# Altium PCB PFSMPS20.PcbDoc (part 1 of 3)
Units mm, origin at the board's own origin, x right, y up, seen from the top; angles counter-clockwise.
Board outline 225.58 x 155.55 mm, 3 copper layers (Top Layer, Mid-Layer 3, Bottom Layer); 286 components, 176 nets, 1075 pads, 309 vias.
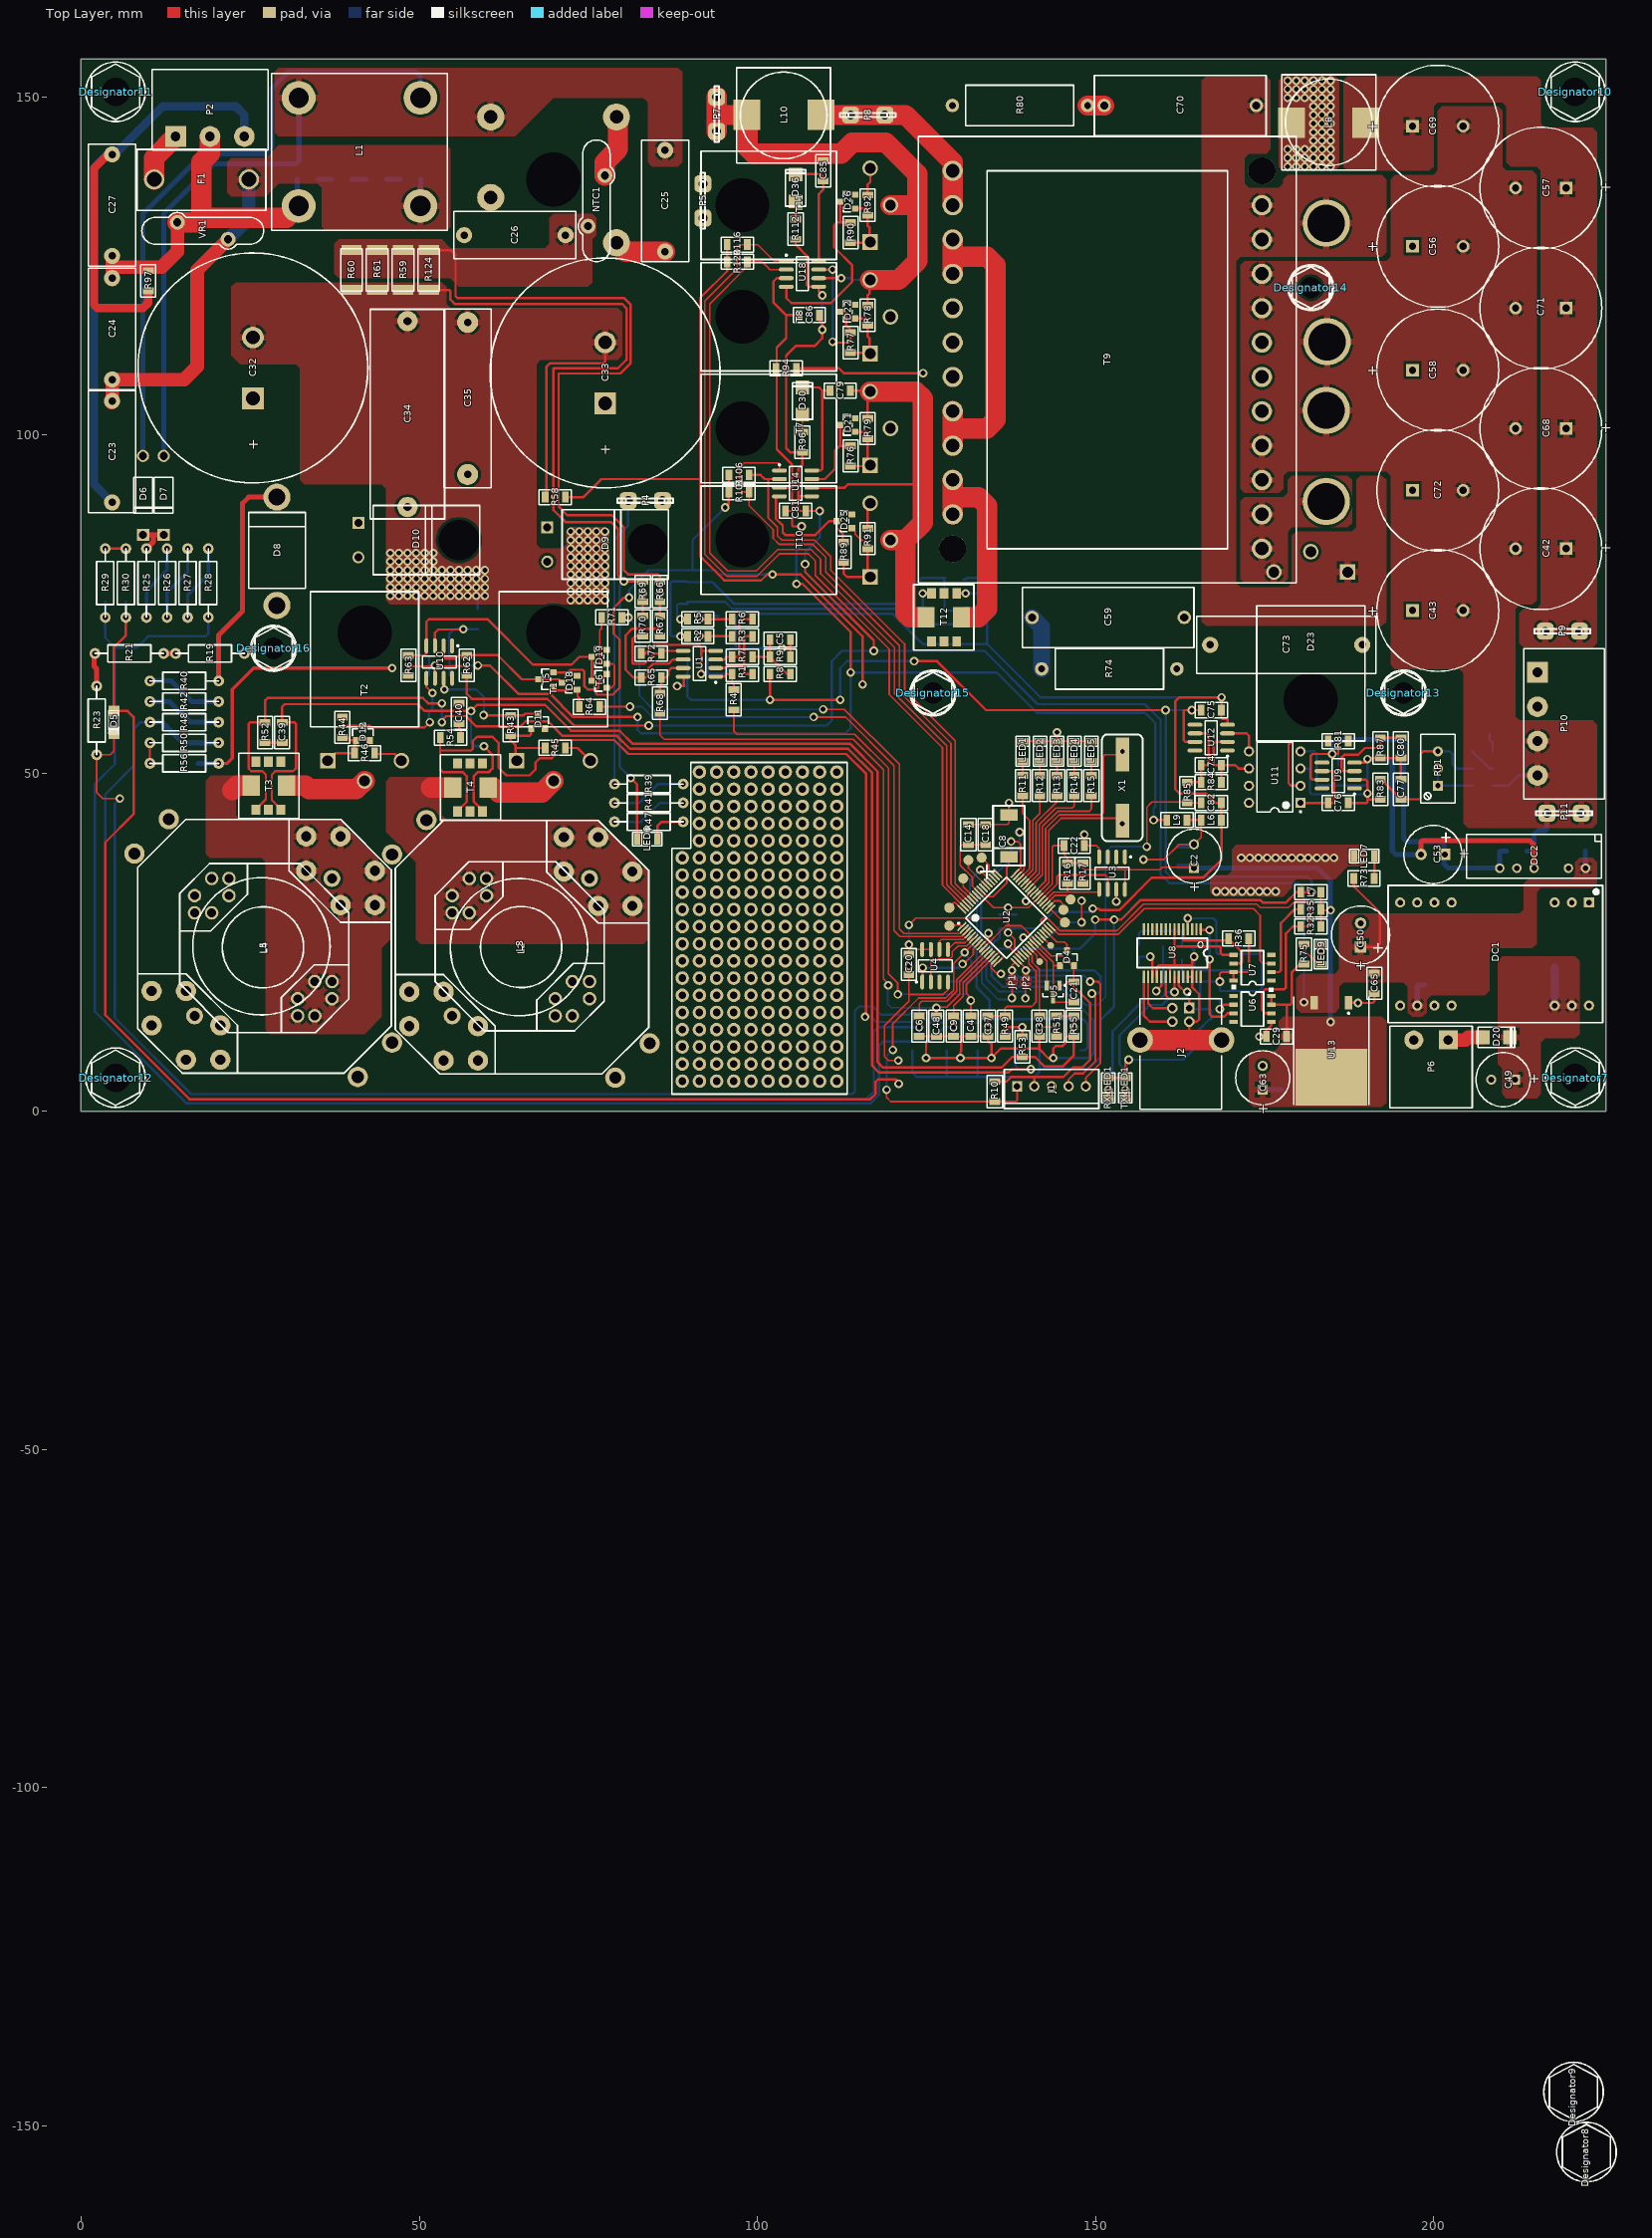
[diagram p0: Top Layer view]
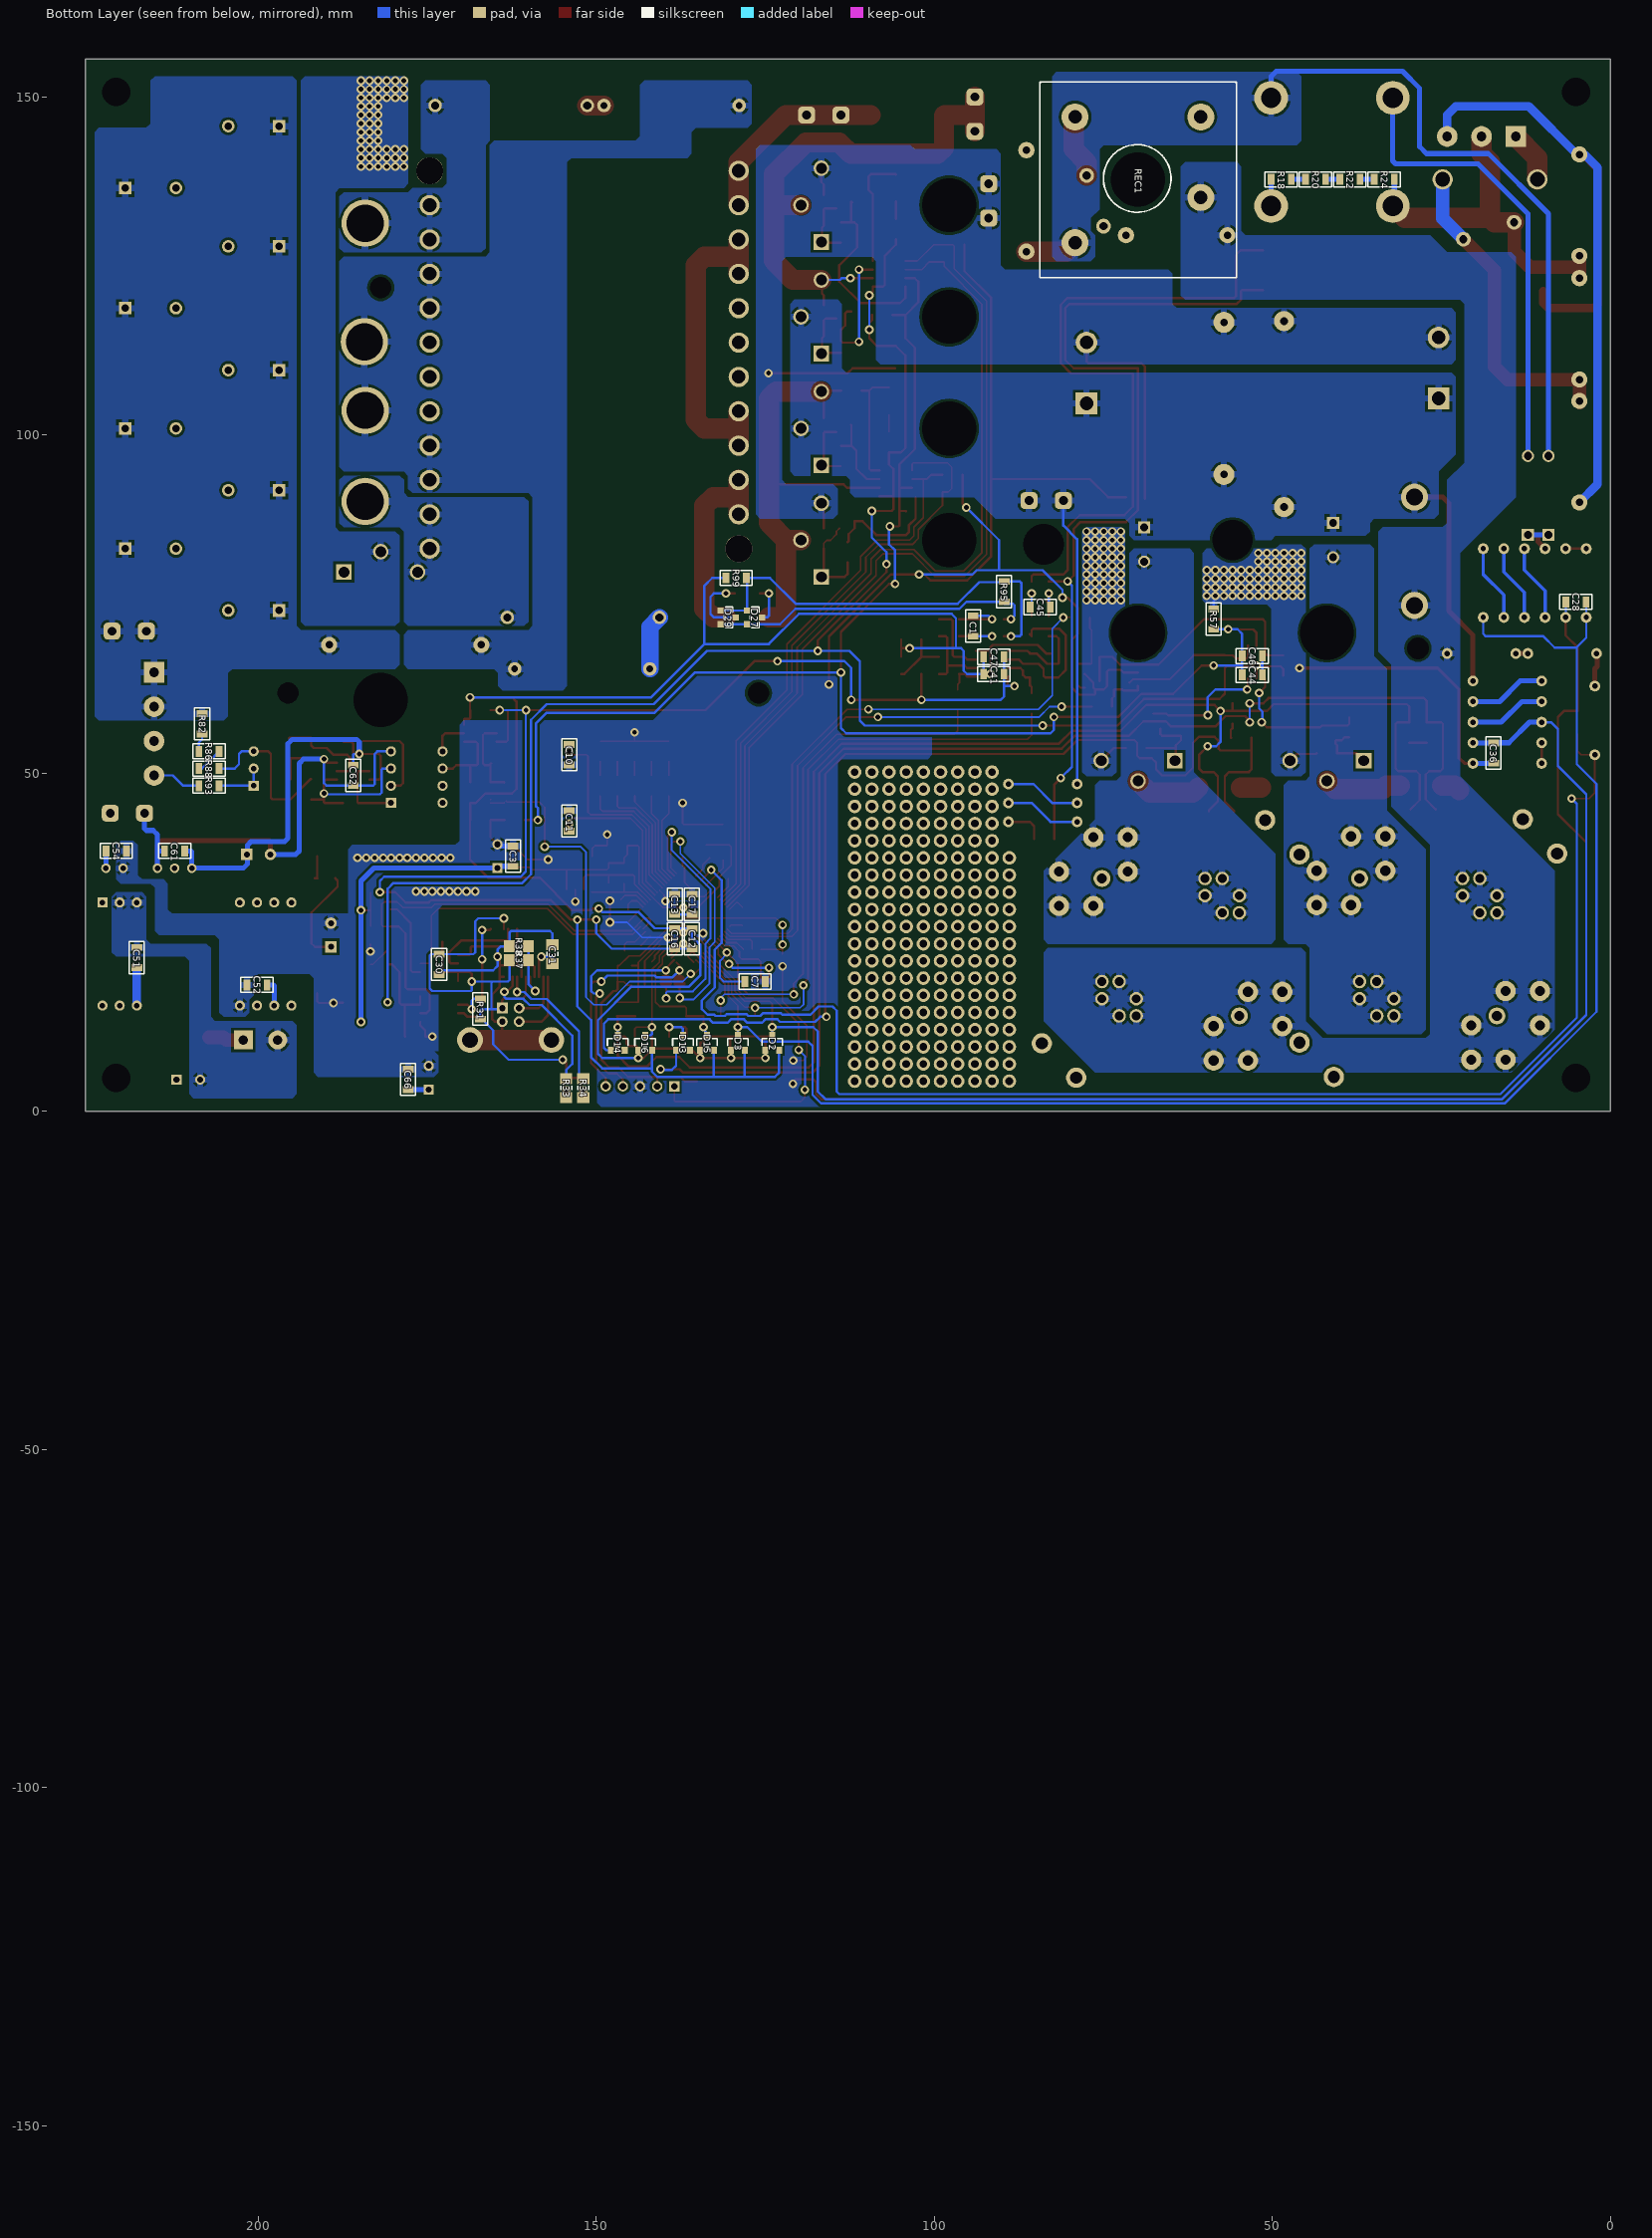
[diagram p1: Bottom Layer view, seen from below]

## Layer stack, top to bottom
Top Layer: signal copper 0.0356
Dielectric: dielectric 0.32, FR-4, Dk 4.8
Mid-Layer 3: signal copper 0.0356
Dielectric: dielectric 0.32, FR-4, Dk 4.8
Bottom Layer: signal copper 0.0356

## Board outline
-0.025,0.025 -0.025,155.575 225.552,155.575 225.552,0.025

## Design rules (kind name [scope] priority, off if disabled: settings)
Clearance Clearance_2 [InNamedPolygon(' ') Or  InNamedPolygon(' ') Or  InNamedPolygon(' ') Or  InNamedPolygon(' ') Or  InNamedPolygon(' ') Or  InNamedPolygon(' ') Or  InNamedPolygon(' ') Or  InNamedPolygon(' ') Or  InNamedPolygon(' ') Or  InNamedPolygon(' ') Or  InNamedPolygon(' ') Or  InNamedPolygon(' ') Or  InNamedPolygon(' ') Or  InNamedPolygon(' ') Or  InNamedPolygon(' ') Or  InNamedPolygon(' ') Or  InNamedPolygon(' ') Or  InNamedPolygon(' ') Or  InNamedPolygon(' ') Or  InNamedPolygon(' ') Or  InNamedPolygon(' ') Or  InNamedPolygon(' ') Or  InNamedPolygon(' ') Or  InNamedPolygon(' ') Or  InNamedPolygon(' ')] p1: gap=0.381
Clearance Clearance_1 [InPolygon] p2: gap=0.381
Clearance [All] p3: gap=0.195
ComponentClearance [All] p1 off: gap=0.254 collisioncheckmode=3 verticalgap=0.254 showdistances=FALSE
ComponentClearance ComponentClearance_1 [All] p2 off: gap=0.254 collisioncheckmode=3 verticalgap=0.254 showdistances=FALSE
DiffPairsRouting DiffPair_DiffPairsRouting [InDifferentialPair ('OSC')] p1: maxlimit=0.254 minlimit=0.254 mostfreqgap=0.254 maxuncoupledlength=12.7
DiffPairsRouting DiffPair_DiffPairsRouting_1 [InDifferentialPair ('OSC')] p2: maxlimit=0.254 minlimit=0.254 mostfreqgap=0.254 maxuncoupledlength=12.7
DiffPairsRouting DiffPair_DiffPairsRouting_2 [InDifferentialPair ('OSC')] p3: maxlimit=0.254 minlimit=0.254 mostfreqgap=0.254 maxuncoupledlength=12.7
DiffPairsRouting DiffPair_DiffPairsRouting_3 [InDifferentialPair ('OSC')] p4: maxlimit=0.254 minlimit=0.254 mostfreqgap=0.254 maxuncoupledlength=12.7
DiffPairsRouting DiffPair_DiffPairsRouting_4 [InDifferentialPair ('OSC')] p5: maxlimit=0.254 minlimit=0.254 mostfreqgap=0.254 maxuncoupledlength=2
DiffPairsRouting DiffPair_DiffPairsRouting_5 [All] p6: maxlimit=0.254 minlimit=0.254 mostfreqgap=0.254 maxuncoupledlength=12.7
DiffPairsRouting DiffPair_DiffPairsRouting_6 [InDifferentialPair ('OSC')] p7: maxlimit=0.254 minlimit=0.254 mostfreqgap=0.254 maxuncoupledlength=12.7
DiffPairsRouting [All] p8: maxlimit=0.254 minlimit=0.254 mostfreqgap=0.254 maxuncoupledlength=12.7
DiffPairsRouting DiffPairsRouting_1 [All] p9: maxlimit=0.254 minlimit=0.254 mostfreqgap=0.254 maxuncoupledlength=12.7
FanoutControl Fanout_LCC [IsLCC] p1: bgadir=Out bgaviamode=Centered fanoutstyle=Auto fanoutdirection=Alternating viagrid=0.025 // Fanout_LCC (Default Rule)
FanoutControl Fanout_BGA [IsBGA] p2: bgadir=Out bgaviamode=Centered fanoutstyle=Auto fanoutdirection=Alternating viagrid=0.025 // Fanout_BGA (Default Rule)
FanoutControl Fanout_Default [All] p4: bgadir=Out bgaviamode=Centered fanoutstyle=Auto fanoutdirection=Alternating viagrid=0.025 // Fanout_Default (Default Rule)
FanoutControl Fanout_Small [(CompPinCount < 5)] p5: bgadir=Out bgaviamode=Centered fanoutstyle=Auto fanoutdirection=OutThenIn viagrid=0.025 // Fanout_Small (Default Rule)
FanoutControl Fanout_BGA_1 [IsBGA] p6: bgadir=Out bgaviamode=Centered fanoutstyle=Auto fanoutdirection=Alternating viagrid=0.025 // Fanout_BGA (Default Rule)
FanoutControl Fanout_LCC_1 [IsLCC] p7: bgadir=Out bgaviamode=Centered fanoutstyle=Auto fanoutdirection=Alternating viagrid=0.025 // Fanout_LCC (Default Rule)
FanoutControl Fanout_SOIC_1 [IsSOIC] p8: bgadir=Out bgaviamode=Centered fanoutstyle=Auto fanoutdirection=Alternating viagrid=0.025 // Fanout_SOIC (Default Rule)
FanoutControl Fanout_Small_1 [(CompPinCount < 5)] p9: bgadir=Out bgaviamode=Centered fanoutstyle=Auto fanoutdirection=OutThenIn viagrid=0.025 // Fanout_Small (Default Rule)
FanoutControl Fanout_Default_1 [All] p10: bgadir=Out bgaviamode=Centered fanoutstyle=Auto fanoutdirection=Alternating viagrid=0.025 // Fanout_Default (Default Rule)
Height Height_1 [All] p2: minheight=0 maxheight=25.4 prefheight=12.7
HoleSize [All] p1: absolutevalues=TRUE maxlimit=8 minlimit=0.025 maxpercent=80.000 minpercent=20.000
LayerPairs LayerPairs_1 [All] p2: enforce=TRUE
MatchedLengths [InNet('OSC_N')] p1: tolerance=0.001 checknetsindiffpair=TRUE checkdiffpairvsdiffpair=TRUE checkothers=TRUE
PasteMaskExpansion PasteMaskExpansion_1 [All] p2: expansion=0
PlaneClearance [(IsPolygon)] p1: clearance=0.635
PlaneClearance PlaneClearance_1 [(IsPolygon)] p2: clearance=0.635
PolygonConnect PolygonConnect_7 [(InComponent('U13')) vs IsNamedPolygon(' ')] p1: connectstyle=Direct reliefconductorwidth=0.254 reliefentries=4 polygonreliefangle="90 Angle"
PolygonConnect PolygonConnect_6 [(InComponent('NTC1')) vs IsNamedPolygon(' ')] p2: connectstyle=Direct reliefconductorwidth=0.254 reliefentries=4 polygonreliefangle="90 Angle"
PolygonConnect PolygonConnect_5 [(InComponent('R60')  Or  InComponent('R61')  Or  InComponent('R59')  Or  InComponent('R124')) vs IsNamedPolygon(' ') Or  IsNamedPolygon(' ')] p3: connectstyle=Direct reliefconductorwidth=0.254 reliefentries=4 polygonreliefangle="90 Angle"
PolygonConnect PolygonConnect_4 [(InComponent('L8')) vs IsNamedPolygon(' ')] p4: connectstyle=Direct reliefconductorwidth=0.254 reliefentries=4 polygonreliefangle="90 Angle"
PolygonConnect PolygonConnect_3 [(InPadClass('All Pads')) vs IsNamedPolygon(' ') Or  IsNamedPolygon(' ') Or  IsNamedPolygon(' ')] p5: connectstyle=Relief reliefconductorwidth=1 reliefentries=4 polygonreliefangle="90 Angle"
PolygonConnect PolygonConnect_2 [All vs IsNamedPolygon(' ') Or  IsNamedPolygon(' ') Or  IsNamedPolygon(' ')] p6: connectstyle=Direct reliefconductorwidth=0.254 reliefentries=4 polygonreliefangle="90 Angle"
PolygonConnect [All] p7: connectstyle=Relief reliefconductorwidth=1 reliefentries=4 polygonreliefangle="90 Angle"
PolygonConnect PolygonConnect_1 [All] p8: connectstyle=Relief reliefconductorwidth=1 reliefentries=4 polygonreliefangle="90 Angle"
RoutingLayers [All] p1: top layer_v5=TRUE mid layer 3_v5=FALSE bottom layer_v5=TRUE
RoutingPriority RoutingPriority_1 [All] p2: routingpriority=0
RoutingTopology RoutingTopology_1 [All] p2: topology=Shortest
RoutingVias [All] p1: holewidth=0.6 width=1 viastyle="Through Hole" minholewidth=0.711 minwidth=1.27 maxholewidth=0.711 maxwidth=1.27
ShortCircuit ShortCircuit_1 [All] p2: allowed=FALSE
SilkscreenOverComponentPads [All] p1: minsilkscreentomaskgap=0.254
SolderMaskExpansion [All] p1: expansion=0.102
SolderMaskExpansion SolderMaskExpansion_1 [All] p2: expansion=0.102
TestPointUsage [All] p1: valid=0 allowmultiple=FALSE
TestPointUsage TestPointUsage_1 [All] p2: valid=0 allowmultiple=FALSE
Testpoint [All] p1: side=15 testpointundercomponent=TRUE minsize=1.016 maxsize=2.54 preferedsize=1.524 minholesize=0 maxholesize=1.016 preferedholesize=0.813 testpointgrid=0.025 style=1023 order=0-112345678
Testpoint Testpoint_1 [All] p2: side=15 testpointundercomponent=TRUE minsize=1.016 maxsize=2.54 preferedsize=1.524 minholesize=0 maxholesize=1.016 preferedholesize=0.813 testpointgrid=0.025 style=1023 order=0-112345678
UnRoutedNet UnRoutedNet_1 [All] p2:
Width [All] p1 off: maxlimit=3 minlimit=0.2 preferedwidth=0.2
14 further rules are at their usual default settings.

## Classes and differential pairs
component class MCU: C1 C4 C5 C6 C7 C8 C9 C10 C11 C12 C13 C14 C16 C17 C18 C20 C21 C22 D2 D3 D4 J1 JP1 JP2 LED1 LED2 LED3 LED4 LED5 OSC? R1 R2 R3 R4 R5 R6 R7 R8 R9 R10 R11 R12 R13 R14 R15 R16 R17 U1 U2 U3 U4 U5 X1
component class PFC: C32 C33 C34 C35 C36 C37 C38 C39 C40 C41 C44 C45 C46 C47 C48 D8 D9 D10 D11 D12 D13 D14 D15 D16 D18 D19 L2 L3 L4 L5 L9 LED6 P4 P5 R39 R40 R41 R42 R43 R44 R45 R46 R47 R48 R49 R50 R51 R52 R53 R54 R55 R56 R57 R58 R59 R60 R61 R62 R63 R64 R65 R66 R67 R68 R69 R70 R71 R72 R124 T1 T2 T3 T4 T5 T6 U10
component class PSU: C2 C3 C49 C50 C51 C52 C53 C54 C61 C63 C65 C66 D20 DC1 DC2 L6 L7 LED7 LED9 P6 R73 R75 U13
component class REC: C23 C24 C25 C26 C27 C28 D5 D6 D7 F1 L1 NTC1 P2 R18 R19 R20 R21 R22 R23 R24 R25 R26 R27 R28 R29 R30 R97 REC1 VR1
component class SMPS: C42 C43 C56 C57 C58 C59 C62 C68 C69 C70 C71 C72 C73 C74 C75 C76 C77 C79 C80 C81 C82 C85 C86 D21 D22 D23 D25 D26 D27 D29 D30 D36 L8 L10 P7 P8 P9 P10 P11 R74 R76 R77 R78 R79 R80 R81 R82 R83 R84 R85 R86 R87 R88 R89 R90 R91 R92 R93 R94 R95 R96 R99 R101 R106 R112 R116 R120 RP1 T7 T8 T9 T10 T11 T12 U9 U11 U12 U14 U18
component class USB: C29 C30 C31 J2 R31 R32 R33 R34 R35 R36 R37 R38 RX_LED1 TX_LED1 U6 U7 U8

## Components (designator, comment, footprint, x,y, rotation, side; value= is the part's Value field where it differs from the comment)
C1 "Cap" 1206_REFLOW 94.234,71.755 r270 bottom
C2 "Cap" CAPPR3.5-8x12 164.592,37.719 r90 top
C3 "Cap 1206" 1206_REFLOW 162.306,37.719 r270 bottom
C4 "Cap" 1206_REFLOW 131.572,12.573 r90 top
C5 "Cap" 1206_REFLOW 103.378,69.723 r180 top
C6 "Cap 1206" 1206_REFLOW 123.952,12.573 r90 top
C7 "Cap 1206" 1206_REFLOW 126.492,19.177 r0 bottom
C8 "Tantal" "CASE D" 137.096,40.866 r90 top
C9 "Cap 1206" 1206_REFLOW 129.032,12.573 r90 top
C10 "Cap" 1206_REFLOW 153.987,52.729 r90 bottom
C11 "Cap" 1206_REFLOW 153.987,42.929 r90 bottom
C12 "Cap 1206" 1206_REFLOW 135.826,25.527 r270 bottom
C13 "Cap 1206" 1206_REFLOW 138.366,30.607 r270 bottom
C14 "Cap 1206" 1206_REFLOW 131.217,40.894 r270 top
C16 "Cap 1206" 1206_REFLOW 138.366,25.527 r270 bottom
C17 "Cap 1206" 1206_REFLOW 135.826,30.607 r270 bottom
C18 "Cap 1206" 1206_REFLOW 133.757,40.894 r270 top
C20 "Cap 1206" 1206_REFLOW 122.428,21.717 r270 top
C21 "Cap 1206" 1206_REFLOW 146.812,17.653 r270 top
C22 "Cap 1206" 1206_REFLOW 146.875,39.267 r0 top
C23 "Cap" "RECT 18.0X7.0 RM15.0" 4.572,97.529 r90 top
C24 "Cap" "RECT 18.0X7.0 RM15.0" 4.572,115.697 r270 top
C25 "Cap" "RECT 18.0X7.0 RM15.0" 86.36,134.62 r270 top
C26 "Cap" "RECT 18.0X7.0 RM15.0" 64.135,129.54 r180 top
C27 "Cap" "RECT 18.0X7.0 RM15.0" 4.572,133.985 r90 top
C28 "Cap 1206" 1206_REFLOW 5.08,75.311 r180 bottom
C29 "Cap 1206" 1206_REFLOW 176.784,11.049 r180 top
C30 "Cap 1206" 1206_REFLOW 173.228,21.717 r270 bottom
C31 "Cap" 3216[1206] 156.464,23.241 r270 bottom
C32 "Cap" "CAPR 52X35" 25.4,105.41 r90 top
C33 "Cap" "CAPR 52X35" 77.479,104.674 r90 top
C34 "Cap" "RECT 31.0X11.0 RM27.5" 48.26,116.84 r270 top
C35 "Cap" "RECT 26.5X7.0 RM22.5" 57.15,105.41 r270 top
C36 "Cap 1206" 1206_REFLOW 17.272,52.959 r90 bottom
C37 "Cap 1206" 1206_REFLOW 134.112,12.573 r270 top
C38 "Cap 1206" 1206_REFLOW 141.732,12.573 r270 top
C39 "Cap 1206" 1206_REFLOW 29.718,56.007 r270 top
C40 "Cap 1206" 1206_REFLOW 55.88,58.825 r270 top
C41 "Cap" 1206_REFLOW 91.186,64.643 r180 bottom
C42 "Cap" CAPPR7.5-18x35.5 215.9,83.185 r180 top
C43 "Cap" CAPPR7.5-18x35.5 200.66,74.041 r0 top
C44 "Cap 1206" 1206_REFLOW 52.959,64.516 r0 bottom
C45 "Cap" 1206_REFLOW 84.328,74.549 r0 bottom
C46 "Cap 1206" 1206_REFLOW 52.959,67.31 r0 bottom
C47 "Cap" 1206_REFLOW 91.186,67.183 r180 bottom
C48 "Cap" 1206_REFLOW 126.492,12.573 r90 top
C49 "Cap" CAPPR3.5-8x12 210.312,4.671 r180 top
C50 "Cap" RA_8.0_RM3.5 189.23,26.063 r90 top
C51 "Cap 1206" 1206_REFLOW 217.932,22.733 r270 bottom
C52 "Cap 1206" 1206_REFLOW 200.152,18.669 r180 bottom
C53 "Cap" RA_8.0_RM3.5 199.926,37.973 r180 top
C54 "Cap 1206" 1206_REFLOW 220.98,38.481 r0 bottom
C56 "Cap" CAPPR7.5-18x35.5 200.66,127.889 r0 top
C57 "Cap" CAPPR7.5-18x35.5 215.9,136.525 r180 top
C58 "Cap" CAPPR7.5-18x35.5 200.66,109.601 r0 top
C59 "Cap" CAP26X19P22_5H 151.892,73.025 r0 top
C61 "Cap 1206" 1206_REFLOW 212.344,38.481 r180 bottom
C62 "Cap 1206" 1206_REFLOW 185.928,49.657 r90 bottom
C63 "Cap" CAPPR3.5-8x12 174.752,4.953 r90 top
C65 "Cap 1206" 1206_REFLOW 191.262,18.923 r90 top
C66 "Cap 1206" 1206_REFLOW 177.8,4.699 r270 bottom
C68 "Cap" CAPPR7.5-18x35.5 215.9,100.965 r180 top
C69 "Cap" CAPPR7.5-18x35.5 200.66,145.669 r0 top
C70 "Cap" CAP26X19P22_5H 162.56,148.717 r0 top
C71 "Cap" CAPPR7.5-18x35.5 215.9,118.745 r180 top
C72 "Cap" CAPPR7.5-18x35.5 200.66,91.821 r0 top
C73 "Cap" "RECT 26.5X8.5 RM22.5" 178.234,68.961 r0 top
C74 "Cap 1206" 1206_REFLOW 167.132,51.181 r0 top
C75 "Cap 1206" 1206_REFLOW 167.132,59.309 r0 top
C76 "Cap 1206" 1206_REFLOW 185.928,45.593 r0 top
C77 "Cap 1206" 1206_REFLOW 195.199,47.625 r270 top
C79 "Cap 1206" 1206_REFLOW 112.268,106.553 r180 top
C80 "Cap 1206" 1206_REFLOW 195.199,53.721 r90 top
C81 "Cap 1206" 1206_REFLOW 105.664,88.773 r180 top
C82 "Cap" 1206_REFLOW 167.132,45.593 r180 top
C85 "Cap 1206" 1206_REFLOW 109.728,139.065 r270 top
C86 "Cap 1206" 1206_REFLOW 107.696,117.729 r180 top
D2 "BAT64-04" SOT23_HIS_PRIMARY 124.968,9.017 r180 bottom
D3 "BAT64-04" SOT23_HIS_PRIMARY 130.048,9.017 r180 bottom
D4 "BAT64-04" SOT23_HIS_PRIMARY 144.78,21.539 r0 top
D5 "BZV55CXXX" D_MINIMELF_BZV55C5V1(Primary) 4.826,57.531 r270 top
D6 "1N4007" AFL-W2/X1.8D 9.144,96.901 r270 top
D7 "1N4007" AFL-W2/X1.8D 12.192,96.901 r270 top
D8 "P 1000S" "P 1000 S" 28.956,74.805 r90 top
D9 "DSEP29-06A" "Diode TO-220AC-HV" 71.222,89.07 r270 top
D10 "DSEP29-06A" "Diode TO-220AC-HV" 43.282,89.705 r270 top
D11 "BAS16" SOT23_HIS_PRIMARY 66.548,56.591 r0 top
D12 "BAS16" SOT23_HIS_PRIMARY 40.64,54.813 r0 top
D13 "BAS16" SOT23_HIS_PRIMARY 138.176,9.017 r180 bottom
D14 "BAS16" SOT23_HIS_PRIMARY 147.828,9.017 r180 bottom
D15 "BAT64-04" SOT23_HIS_PRIMARY 134.62,9.017 r180 bottom
D16 "BAT64-04" SOT23_HIS_PRIMARY 143.764,9.017 r180 bottom
D18 "BAS16" SOT23_HIS_PRIMARY 73.33,62.357 r90 top
D19 "BAS16" SOT23_HIS_PRIMARY 77.724,66.167 r90 top
D20 "1N5819" DO-214_S1A(PRIMARY) 209.296,10.922 r0 top
D21 "BAS16" SOT23_HIS_PRIMARY 114.478,100.457 r90 top
D22 "BAS16" SOT23_HIS_PRIMARY 114.478,117.221 r90 top
D23 "DIODE, ULTRAFAST, 30 A, TO-3P" TO-247HV 187.32,79.733 r180 top
D25 "BAS16" SOT23_HIS_PRIMARY 113.97,86.233 r90 top
D26 "BAS16" SOT23_HIS_PRIMARY 114.478,133.477 r90 top
D27 "BAT64-04" SOT23_HIS_PRIMARY 127.686,74.041 r270 bottom
D29 "BAT64-04" SOT23_HIS_PRIMARY 131.572,74.041 r270 bottom
D30 "US1M" DO-214_S1A(PRIMARY) 106.68,105.029 r90 top
D36 "US1M" DO-214_S1A(PRIMARY) 105.664,136.525 r90 top
DC1 "EC3A21HM" DIP24_TRACO 222.972,30.741 r270 top locked
DC2 "AM1D-D" -AM1D_AM1D-D(Primary) 214.884,35.941 r180 top
Designator7 "Comment" WSHR_SPRWSHR_NUT_4MM 220.98,4.953 r0 top
Designator8 "Comment" WSHR_SPRWSHR_NUT_4MM 222.631,-153.924 r0 top
Designator9 "Comment" WSHR_SPRWSHR_NUT_4MM 220.726,-145.034 r0 top
Designator10 "Comment" WSHR_SPRWSHR_NUT_4MM 220.98,150.749 r0 top
Designator11 "Comment" WSHR_SPRWSHR_NUT_4MM 5.08,150.749 r0 top
Designator12 "Comment" WSHR_SPRWSHR_NUT_4MM 5.08,4.953 r0 top
Designator13 "Comment" WSHR_SPRWSHR_NUT_3MM 195.58,61.849 r0 top
Designator14 "Comment" WSHR_SPRWSHR_NUT_3MM 181.864,121.793 r0 top
Designator15 "Comment" WSHR_SPRWSHR_NUT_3MM 125.984,61.849 r0 top
Designator16 "Comment" WSHR_SPRWSHR_NUT_3MM 28.448,68.453 r0 top
F1 "Fuse Holder PCB P15mm" "Fuse Holder PCB P15mm" 10.795,137.922 r0 top
J1 "SIP5" "SIP5 _2" 138.43,3.683 r0 top
J2 "1-1470156-1" USB2.5-2H4D 162.636,14.251 r270 top
JP1 "SOLDERCONTACT" SOLDERCONTACT#1 137.668,19.177 r90 top
JP2 "SOLDERCONTACT" SOLDERCONTACT#2 139.7,19.177 r270 top
L1 "CMIND" CommonModeChoke 50.165,133.86 r180 top
L2 "RM-14 Choke" RM-14 76.454,40.513 r270 top
L3 "RM-10 Choke" RM-10 54.864,31.877 r0 top
L4 "RM-10 Choke" RM-10 37.084,16.637 r180 top
L5 "RM-14 Choke" RM-14 38.354,40.64 r270 top
L6 "RES" 1206_REFLOW 167.132,43.053 r0 top
L7 "RES" 1206_REFLOW 181.864,32.385 r180 top
L8 "SRP1270-100M" "BOURNS - SRP1270-100M" 178.992,146.177 r0 top
L9 "RES" 1206_REFLOW 162.052,43.053 r0 top
L10 "Resonanse inductor. Do Not Place." "BOURNS - SRP1270-100M" 109.425,147.32 r180 top
LED1 "LED" LED_1206 137.969,50.741 r90 top
LED2 "LED" LED_1206 140.509,50.741 r90 top
LED3 "LED" LED_1206 143.049,50.741 r90 top
LED4 "LED" LED_1206 145.589,50.741 r90 top
LED5 "LED" LED_1206 148.129,50.741 r90 top
LED6 "LED" LED_1206 86.189,38.973 r180 top
LED7 "LED" LED_1206 192.234,36.433 r180 top
LED9 "Green" LED_1206 182.102,20.745 r90 top
NTC1 "Varristor" VARISTOR_14 76.2,134.62 r270 top
P2 "MSTBA 2,5/ 3-G-5,08" MSTBA2.5/3G-5.08 13.97,144.145 r0 top
P4 "FASTON 6.3MM" "FASTON 6.3mm" 83.312,90.297 r0 top
P5 "FASTON 6.3MM" "FASTON 6.3mm" 91.948,134.493 r90 top
P6 "MSTBA 2,5/ 2-G-5,08" "STLZ950 2G-5.08-H" 202.184,10.541 r180 top
P7 "FASTON 6.3MM" "FASTON 6.3mm" 93.98,147.32 r90 top
P8 "FASTON 6.3MM" "FASTON 6.3mm" 116.205,147.32 r0 top
P9 "FASTON 6.3MM" "FASTON 6.3mm" 218.948,70.993 r0 top
P10 "MSTBA 2,5/ 4-G-5,08" MSTBA2.5/4G-5.08 215.392,64.897 r270 top
P11 "FASTON 6.3MM" "FASTON 6.3mm" 219.456,44.069 r180 top
R1 "RES" 1206_REFLOW 97.79,64.643 r180 top
R2 "RES" 1206_REFLOW 91.186,70.231 r0 top
R3 "RES" 1206_REFLOW 97.79,70.231 r0 top
R4 "RES" 1206_REFLOW 96.52,60.833 r90 top
R5 "RES" 1206_REFLOW 91.186,72.771 r0 top
R6 "RES" 1206_REFLOW 97.79,72.771 r0 top
R7 "RES" 1206_REFLOW 97.79,67.183 r180 top
R8 "RES" 1206_REFLOW 103.378,64.643 r0 top
R9 "RES" 1206_REFLOW 103.378,67.183 r180 top
R10 "RES" 1206_REFLOW 135.128,2.921 r270 top
R11 "RES" 1206_REFLOW 139.255,48.157 r90 top
R12 "RES" 1206_REFLOW 141.795,48.157 r90 top
R13 "RES" 1206_REFLOW 144.335,48.157 r90 top
R14 "RES" 1206_REFLOW 146.875,48.157 r90 top
R15 "RES" 1206_REFLOW 149.415,48.157 r90 top
R16 "RES" 1206_REFLOW 145.859,35.203 r270 top
R17 "RES" 1206_REFLOW 148.145,35.203 r270 top
R18 "RES" 1206_REFLOW 48.685,137.795 r180 bottom
R19 "RES" RA161004 24.13,67.691 r180 top locked
R20 "RES" 1206_REFLOW 43.605,137.795 r180 bottom
R21 "RES" RA161004 12.192,67.691 r180 top locked
R22 "RES" 1206_REFLOW 38.525,137.795 r180 bottom
R23 "RES" RA161004 2.286,62.865 r270 top locked
R24 "RES" 1206_REFLOW 33.445,137.795 r180 bottom
R25 "RES" RA161004 9.652,83.185 r270 top locked
R26 "RES" RA161004 12.7,83.185 r270 top locked
R27 "RES" RA161004 15.748,83.185 r270 top locked
R28 "RES" RA161004 18.796,83.185 r270 top
R29 "RES" RA161004 3.556,73.025 r90 top locked
R30 "RES" RA161004 6.604,83.185 r270 top
R31 "RES" 1206_REFLOW 167.132,15.113 r90 bottom
R32 "RES" 1206_REFLOW 181.864,27.305 r180 top
R33 "Resistor" 3216[1206] 154.432,3.429 r270 bottom
R34 "Resistor" 3216[1206] 151.892,3.429 r270 bottom
R35 "RES" 1206_REFLOW 181.864,29.845 r180 top
R36 "RES" 1206_REFLOW 171.196,25.527 r180 top
R37 "Resistor" 3216[1206] 161.417,22.352 r0 bottom
R38 "Resistor" 3216[1206] 161.417,24.384 r180 bottom
R39 "RES" RA161004 78.867,48.387 r0 top
R40 "RES" RA161004 20.32,63.627 r180 top locked
R41 "RES" RA161004 78.867,45.593 r0 top locked
R42 "RES" RA161004 20.32,60.579 r180 top locked
R43 "RES" 1206_REFLOW 63.5,57.023 r270 top
R44 "RES" 1206_REFLOW 38.608,56.769 r90 top
R45 "RES" 1206_REFLOW 70.104,53.721 r180 top
R46 "RES" 1206_REFLOW 41.91,52.959 r0 top
R47 "RES" RA161004 78.867,42.799 r0 top locked
R48 "RES" RA161004 20.32,57.531 r180 top
R49 "RES" 1206_REFLOW 136.652,12.573 r270 top
R50 "RES" RA161004 20.32,54.483 r180 top
R51 "RES" 1206_REFLOW 144.272,12.573 r90 top
R52 "RES" 1206_REFLOW 27.178,56.007 r90 top
R53 "RES" 1206_REFLOW 139.192,9.525 r90 top
R54 "RES" 1206_REFLOW 54.61,55.245 r180 top
R55 "RES" 1206_REFLOW 146.812,12.573 r90 top
R56 "RES" RA161004 10.16,51.435 r0 top locked
R57 "RES" 1206_REFLOW 58.674,72.771 r270 bottom
R58 "RES" 1206_REFLOW 70.104,90.805 r0 top
R59 "RES" 2512_REFLOW 47.593,124.394 r270 top
R60 "RES" 2512_REFLOW 39.973,124.394 r270 top
R61 "RES" 2512_REFLOW 43.783,124.394 r270 top
R62 "RES" 1206_REFLOW 57.023,65.913 r90 top
R63 "RES" 1206_REFLOW 48.387,65.913 r90 top
R64 "RES" 1206_REFLOW 75.184,59.817 r180 top
R65 "RES" 1206_REFLOW 84.328,64.135 r0 top
R66 "RES" 1206_REFLOW 85.598,76.835 r270 top
R67 "RES" 1206_REFLOW 85.598,71.755 r270 top
R68 "RES" 1206_REFLOW 85.598,60.325 r90 top
R69 "RES" 1206_REFLOW 83.058,76.835 r270 top
R70 "RES" 1206_REFLOW 83.058,71.755 r270 top
R71 "RES" 1206_REFLOW 78.486,73.025 r180 top
R72 "RES" 1206_REFLOW 84.328,67.691 r0 top
R73 "RES" 1206_REFLOW 189.738,34.417 r0 top
R74 "2W" "5.5x16mm (2W BODY RES)" 142.052,65.405 r0 top
R75 "RES" 1206_REFLOW 180.848,23.241 r90 top
R76 "RES" 1206_REFLOW 113.792,96.901 r270 top
R77 "RES" 1206_REFLOW 113.792,113.665 r90 top
R78 "RES" 1206_REFLOW 116.332,117.729 r90 top
R79 "RES" 1206_REFLOW 116.332,100.965 r270 top
R80 "2W" "5.5x16mm (2W BODY RES)" 148.844,148.717 r180 top locked
R81 "RES" 1206_REFLOW 185.928,54.737 r180 top
R82 "RES" 1206_REFLOW 208.28,57.277 r270 bottom
R83 "RES" 1206_REFLOW 192.151,47.625 r90 top
R84 "RES" 1206_REFLOW 167.132,48.641 r0 top
R85 "RES" 1206_REFLOW 163.576,47.117 r90 top
R86 "RES" 1206_REFLOW 207.264,53.213 r180 bottom
R87 "RES" 1206_REFLOW 192.151,53.721 r270 top
R88 "RES" 1206_REFLOW 207.264,50.673 r180 bottom
R89 "RES" 1206_REFLOW 112.776,82.677 r90 top
R90 "RES" 1206_REFLOW 113.792,129.921 r270 top
R91 "RES" 1206_REFLOW 116.332,84.685 r90 top
R92 "RES" 1206_REFLOW 116.332,133.985 r270 top
R93 "RES" 1206_REFLOW 207.264,48.133 r0 bottom
R94 "RES" 1206_REFLOW 104.267,109.855 r180 top
R95 "RES" 1206_REFLOW 89.662,76.835 r90 bottom
R96 "RES" 1206_REFLOW 106.68,98.933 r90 top
R97 "RES" 1206_REFLOW 9.906,122.809 r90 top
R99 "RES" 1206_REFLOW 129.286,78.867 r0 bottom
R101 "RES" 1206_REFLOW 97.282,91.567 r0 top
R106 "RES" 1206_REFLOW 97.282,94.107 r0 top
R112 "RES" 1206_REFLOW 105.664,130.429 r90 top
R116 "RES" 1206_REFLOW 97.028,128.143 r0 top
R120 "RES" 1206_REFLOW 97.028,125.603 r0 top
R124 "RES" 2512_REFLOW 51.403,124.394 r270 top
REC1 "KBPC2504W" KBPC2504W 60.468,128.427 r0 bottom
RP1 "Trimmer" BOURNS3296W 199.136,46.609 r90 top locked
RX_LED1 "GREEN LED" LED_1206 153.178,5.925 r270 top
T1 "MOSFET, N, 500V, TO-247" TO-247HV 64.394,51.839 r0 top
T2 "MOSFET, N, 500V, TO-247" TO-247HV 36.454,51.839 r0 top
T3 "PA1005.XXXNL" "PA1005.XXXNL Series" 25.845,51.688 r0 top
T4 "PA1005.XXXNL" "PA1005.XXXNL Series" 55.667,51.434 r0 top
T5 "BC847A" SOT23_HIS_PRIMARY 69.85,62.865 r90 top
T6 "BC847A" SOT23_HIS_PRIMARY 77.724,62.611 r90 top
T7 "MOSFET, N, 500V, TO-247" TO-247HV 116.69,95.509 r90 top
T8 "MOSFET, N, 500V, TO-247" TO-247HV 116.69,112.019 r90 top
T9 "ETD55_Transformer" ETD54_Transformer 174.625,139.065 r270 top
T10 "MOSFET, N, 500V, TO-247" TO-247HV 116.69,78.999 r90 top
T11 "MOSFET, N, 500V, TO-247" TO-247HV 116.69,128.529 r90 top
T12 "PA1005.XXXNL" "PA1005.XXXNL Series" 129.476,69.47 r180 top
TX_LED1 "RED LED" LED_1206 155.718,5.925 r270 top
U1 "MCP6022-I/SN (OPA2336)" SOIC-SN8_N 91.44,66.167 r180 top
U2 "dsPIC33FJ64GS606" TQFP-PT64_N 136.842,28.575 r45 top
U3 "24LC04B-I/SN" SOIC-SN8_N 152.463,35.203 r270 top
U4 "23K256-I/SN" SOIC-SN8_N 126.301,21.511 r90 top
U5 "MCP9700T-E/TT" SOT-23-TT3_N 143.764,17.653 r270 top
U6 "HCPL0601" SO8_HIS 173.228,15.113 r0 top
U7 "HCPL0601" SO8_HIS 173.228,21.209 r180 top
U8 "FT232RL" SSOP28 165.562,24.634 r270 top
U9 "MCP601T-I/SN" SOIC-SN8_N 185.928,49.657 r180 top
U10 "MCP1403T-E/SN" SOIC-SN8_N 52.959,66.421 r270 top
U11 "Analog optocoupler" "DIP8 6n138" 180.33,44.303 r180 top locked
U12 "MCP601T-I/SN" SOIC-SN8_N 167.132,55.245 r180 top
U13 "LD1086D2T33TR" D2PAK 184.912,10.541 r180 top
U14 "IRS2186SPBF" SO-8_N 105.664,92.837 r0 top
U18 "IRS2186SPBF" SO-8_N 106.68,123.825 r0 top
VR1 "Varristor" VARISTOR_14 17.974,130.195 r180 top
X1 "XTAL" XTAL 153.987,43.056 r90 top

## Footprints (in the part's own frame and the unit in brackets; to place one, negate y for a bottom-side part, rotate by r counter-clockwise, add the part's x,y. Pads: shape width x height; smd on the part's side, far side on the other; paste and mask are expansions set on the pad)
"5.5x16mm (2W BODY RES)" [mm]
  round 2 hole 1: 1(0,0) 2(20,0)
  silkscreen extent 2.03,-3 18.03,3
1206_REFLOW [mm]
  rect 1x1.6 smd: 1(-1.5,0) 2(1.5,0)
  silkscreen extent -2.38,-1.11 2.38,1.11
2512_REFLOW [mm]
  rect 1.5x3 smd paste-25.4: 1(-2.95,0) 2(2.95,0)
  silkscreen extent -3.15,-1.6 3.15,1.6
3216[1206] [mm] "Chip Resistor; Body 3.2 x 1.6 mm (LxW typ)"
  rect 1.6x1.8 smd: 1(-1.4,0) 2(1.4,0)
  silkscreen extent -0.3,-0.8 0.3,0.8
-AM1D_AM1D-D(Primary) [mm]
  round 1.4 hole 0.8: 1(-7.62,0) 2(-5.08,0) 4(0,0) 5(2.54,0) 6(5.08,0)
  silkscreen extent -10,-5 10,1.5
AFL-W2/X1.8D [mm]
  round 1.8 hole 1.2: 1(0,0)
  rect 1.8x1.8 hole 1.2: 2(11.65,0)
  silkscreen extent 3.17,-1.4 8.47,1.4
BOURNS3296W [mm] "BOURNS3296W Trimmer"
  rect 1.5x1.5 hole 0.8: 1(1.524,-1.524)
  round 1.5 hole 0.8: 2(4.064,-1.524) 3(6.604,-1.524)
  silkscreen extent -1.02,-4.06 9.14,1.02
"BOURNS - SRP1270-100M" [mm]
  rect 4x4.5 smd: 1(0,0) 2(11,0)
  silkscreen extent -1.4,-7 12.5,7.1
CAP26X19P22_5H [mm]
  round 2 hole 1.2: 1(-11.25,0) 2(11.25,0)
  silkscreen extent -12.7,-4.44 12.7,4.44
CAPPR3.5-8x12 [mm] "Capacitor, Electrolytic, Radial; Body 8 x 12 mm (Dia.xH typ); Pin Spacing 3.5 mm (typ)"
  rect 1.5x1.5 hole 0.9: 1(-1.75,0)
  round 1.5 hole 0.9: 2(1.75,0)
  silkscreen extent -4,-4 4,4
CAPPR7.5-18x35.5 [mm] "Capacitor, Electrolytic, Radial; Body 18 x 35.5 mm (Dia.xH typ); Pin Spacing 7.5 mm (typ)"
  rect 1.85x1.85 hole 1.1: 1(-3.75,0)
  round 1.85 hole 1.1: 2(3.75,0)
  silkscreen extent -9,-9 9,9
"CAPR 52X35" [mm]
  rect 3.2x3.2 hole 2: 1(0,0)
  round 3.2 hole 2: 2(9,0)
  silkscreen extent -12.5,-17 21.5,17
"CASE D" [mm] "Capacitor Case D"
  rect 1.7x2.6 smd paste-25.4: 1(-3.227,-0.127) 2(2.973,-0.127)
  silkscreen extent -6.43,-2.47 4.27,4.13
CommonModeChoke [mm]
  round 5 hole 3: 1(0,0) 2(0,-16) 3(18,0) 4(18,-16)
  silkscreen extent -4,-19.6 22,3.6
D2PAK [mm] "D2-PAK/TO-263-AB; 3 Leads (1 Cropped); Body 15.5 (inc. leads) x 10.5 mm (LxW max)"
  rect 1.05x2 smd: 1(-2.54,-5.5) 3(2.54,-5.5)
  rect 10.55x8.4 smd: 2(0,5.5)
  silkscreen extent -5.57,-6.4 5.57,9.6
D_MINIMELF_BZV55C5V1(Primary) [mm]
  rect 1.6x1.6 smd: A(-1.67,0) K(1.7,0)
  silkscreen extent -1.72,-0.76 1.73,0.76
"Diode TO-220AC-HV" [mil]
  rect 70x70 hole 46: 1(106.69,-90)
  round 70 hole 46: 2(306.69,-90)
  round 0 hole 236.22: ""(206.69,496)
  silkscreen extent 5,-4 409,616
"DIP8 6n138" [mm]
  rect 1.5x1.5 hole 0.9: 1(-0.01,-1.29)
  round 1.5 hole 0.9: 2(-0.01,-3.83) 3(-0.01,-6.37) 4(-0.01,-8.91) 5(7.61,-8.91) 6(7.61,-6.37) 7(7.61,-3.83) 8(7.61,-1.29)
  silkscreen extent -0.14,-10.25 6.45,0.13, body extent 0.2,-10.25 7.4,0.05, height 5.33
DIP24_TRACO [mm]
  rect 1.5x1.5 hole 0.8: 1(-0.12,0.04)
  round 1.5 hole 0.8: 2(-0.12,-2.5) 3(-0.12,-5.04) 5(-0.12,-22.82) 7(-0.12,-27.9) 8(15.12,-27.9) 9(-0.12,-20.28) 10(15.12,-22.82) 11(-0.12,-25.36) 14(15.12,-25.36) 16(15.12,-20.28) 22(15.12,-5.04) 23(15.12,-2.5) 24(15.12,0.04)
  silkscreen extent -2.66,-29.68 17.66,2.07
DO-214_S1A(PRIMARY) [mm]
  rect 2x2 smd: A(-2,0) K(2,0)
  silkscreen extent -2.7,-1.5 2.75,1.5
ETD54_Transformer [mm]
  round 3 hole 2: 1(0,-45.72) 2(5.08,-45.72) 3(10.16,-45.72) 4(15.24,-45.72) 5(20.32,-45.72) 6(25.4,-45.72) 7(30.48,-45.72) 8(35.56,-45.72) 9(40.64,-45.72) 10(45.72,-45.72) 11(50.8,-45.72) 12(55.88,0) 13(50.8,0) 14(45.72,0) 15(40.64,0) 16(35.56,0) 17(30.48,0) 18(25.4,0) 19(20.32,0) 20(15.24,0) 21(10.16,0) 22(5.08,0)
  round 4 hole 4 unplated: ""(0,0) ""(55.88,-45.72)
  silkscreen extent -5.08,-50.8 60.96,5.08
"FASTON 6.3mm" [mm]
  rrect50% 2.5x2.5 hole 1.3: 1(-2.413,0) 2(2.667,0)
  silkscreen extent -4,-0.32 4.25,0.32
"Fuse Holder PCB P15mm" [mm]
  round 3 hole 2.2: 1(0,-0.127) 2(14,-0.127)
  silkscreen extent -2.54,-4.72 16.51,4.3
KBPC2504W [mm]
  round 4 hole 2: 1(0.1,-6.7) 2(18.7,0) 3(18.7,-18.6) 4(0.1,-18.6)
  round 0 hole 8: M6(9.382,-9.368)
  silkscreen extent -5.2,-23.8 23.9,5.15
LED_1206 [mm]
  rect 1x1.6 smd paste-25.4: A(0.972,-1.286) K(3.972,-1.286)
  silkscreen extent 0.27,-2.29 4.67,-0.29
MSTBA2.5/3G-5.08 [mil]
  rect 120x120 hole 56: 1(0,0)
  round 120 hole 56: 2(200,0) 3(400,0)
  silkscreen extent -138,-80 538,390
MSTBA2.5/4G-5.08 [mil]
  rect 120x120 hole 56: 1(0,0)
  round 120 hole 56: 2(200,0) 3(400,0) 4(600,0)
  silkscreen extent -138,-80 738,390
"P 1000 S" [mm] "1200V Rectifier Diode"
  round 4 hole 2.5: A(0,0) K(16,0)
  silkscreen extent 2.5,-4.19 13.75,4.19
"PA1005.XXXNL Series" [mm]
  rect 1.3x1.524 smd: 1(0,-7.11) 2(1.85,-7.11) 3(3.7,-7.11) 4(3.7,0) 5(1.85,0) 6(0,0)
  rect 2.54x3.05 smd: 7(4.532,-3.555) 8(-0.699,-3.555)
  silkscreen extent -2.54,-8.4 6.35,1.27
RA161004 [mm]
  round 1.6 hole 0.8: 1(0,0) 2(10.16,0)
  silkscreen extent 0,-1.27 10.16,1.27
RA_8.0_RM3.5 [mm]
  rect 1.7x1.7 hole 0.9: 1(-1.75,0)
  round 1.7 hole 0.9: 2(1.75,0)
  silkscreen extent -4.3,-4.3 4.3,4.3
"RECT 18.0X7.0 RM15.0" [mm]
  round 2.4 hole 1.1: 1(-7.5,0) 2(7.5,0)
  silkscreen extent -9,-3.5 9,3.5
"RECT 26.5X7.0 RM22.5" [mm]
  round 3.1 hole 1.1: 1(-11.25,0) 2(11.25,0)
  silkscreen extent -13.25,-3.5 13.25,3.5
"RECT 26.5X8.5 RM22.5" [mm]
  round 2.4 hole 1.1: 1(-11.25,0) 2(11.25,0)
  silkscreen extent -13.25,-4.25 13.25,4.25
"RECT 31.0X11.0 RM27.5" [mm]
  round 3 hole 1.2: 1(0,0) 2(27.5,0)
  silkscreen extent -1.75,-5.5 29.25,5.5
RM-10 [mm] "RM-10 Ferrite choke"
  round 2 hole 1.3: 1(0,0) 2(2.54,2.54) 3(5.08,2.54) 4(5.08,0) 5(2.54,-2.54) 6(0,-2.54) 7(15.24,-15.24) 8(17.78,-12.7) 9(20.32,-12.7) 10(20.32,-15.24) 11(17.78,-17.78) 12(15.24,-17.78)
  round 2.5 hole 1.5: ""(0,-17.78) ""(20.32,2.54)
  silkscreen extent -2.5,-20 22.5,5
RM-14 [mm] "RM-14 Choke"
  round 3 hole 1.5: 1(0,0) 2(5.08,5.08) 3(10.16,5.08) 4(10.16,0) 5(5.08,-5.08) 6(0,-5.08) 7(22.86,-22.86) 8(27.94,-17.78) 9(33.02,-17.78) 10(33.02,-22.86) 11(27.94,-27.94) 12(22.86,-27.94)
  round 3 hole 1.8: ""(-2.54,-25.4) ""(2.54,-30.48) ""(30.48,7.62) ""(35.56,2.54)
  silkscreen extent -2.5,-30 35,7.5
"SIP5 _2" [mil]
  rect 60x60 hole 38.19: 1(0,0)
  round 60 hole 38.19: 2(100,0) 3(200,0) 4(300,0) 5(400,0)
  silkscreen extent -76,-130 476,98
SO8_HIS [mm]
  rect 1.2x0.6 smd: 1(-2.8,1.905) 2(-2.8,0.635) 3(-2.8,-0.635) 4(-2.8,-1.905) 5(2.8,-1.905) 6(2.8,-0.635) 7(2.8,0.635) 8(2.8,1.905)
  silkscreen extent -3.08,-2.54 1.65,3.56
SO-8_N [mm] "SOIC, 8-Leads, Body 4.9x3.9mm, Pitch 1.27mm, IPC Medium Density"
  oval 2.2x0.6 smd: 1(-2.4,1.905) 2(-2.4,0.635) 3(-2.4,-0.635) 4(-2.4,-1.905) 5(2.4,-1.905) 6(2.4,-0.635) 7(2.4,0.635) 8(2.4,1.905)
  silkscreen extent -2.52,-2.5 0.9,2.88, body extent -1.95,-2.45 1.95,2.45, height 1.75
SOIC-SN8_N [mm] "SOIC, 8-Leads, Body 4.9x3.8mm, Pitch 1.27mm, IPC Medium Density"
  oval 2.2x0.6 smd: 1(-2.4,1.905) 2(-2.4,0.635) 3(-2.4,-0.635) 4(-2.4,-1.905) 5(2.4,-1.905) 6(2.4,-0.635) 7(2.4,0.635) 8(2.4,1.905)
  silkscreen extent -2.53,-2.5 0.9,2.88, body extent -2,-2.5 2,2.5, height 1.75
SOLDERCONTACT#1 [mm]
  rect 0.25x0.25 smd: 1(-0.663,-0.003) 2(0.658,-0.003)
  Top Layer lines w0.1: 0.183,0.795 cw(c0.183,-0.005) 0.254,0.792 ; -0.188,0.792 -0.188,-0.795 ; 0.183,0.79 0.183,-0.798 ; 0.183,-0.805 ccw(c0.183,-0.005) 0.254,-0.802 ; 0.254,0.792 cw(c0.183,-0.005) 0.983,-0.003 ; 0.254,0.792 cw(c0.183,-0.005) 0.983,-0.003 ; -0.988,-0.003 cw(c-0.188,0) -0.696,0.618 cw(c-0.188,0) -0.188,0.8 ccw(c-0.188,0) -0.988,-0.003 ; -0.988,-0.003 ccw(c-0.188,0) -0.188,-0.8 cw(c-0.188,0) -0.988,-0.003 ; 0.983,-0.003 cw(c0.183,-0.005) 0.834,-0.47 cw(c0.183,-0.005) 0.254,-0.802 ; 0.983,-0.003 cw(c0.183,-0.005) 0.254,-0.802
  Top Layer lines w0.3: -0.327,0.376 ccw(c-0.191,0) -0.327,-0.376 ; 0.322,0.371 cw(c0.185,-0.005) 0.322,-0.381 ; -0.345,0.157 -0.345,-0.16 ; 0.34,0.155 0.34,-0.163 ; -0.823,-0.003 cw(c-0.188,0) -0.298,0.625 ccw(c-0.188,0) -0.8,0.168 ccw(c-0.188,0) -0.823,-0.003 ; -0.823,-0.003 ccw(c-0.188,0) -0.298,-0.625 cw(c-0.188,0) -0.823,-0.003 ; 0.818,-0.003 ccw(c0.183,-0.005) 0.293,0.62 cw(c0.183,-0.005) 0.818,-0.003 ; 0.818,-0.003 cw(c0.183,-0.005) 0.795,-0.173 cw(c0.183,-0.005) 0.293,-0.63 ccw(c0.183,-0.005) 0.818,-0.003
SOLDERCONTACT#2 [mm]
  rect 0.25x0.25 smd: 1(-0.663,-0.003) 2(0.658,-0.003)
  Top Layer lines w0.1: -0.188,-0.8 cw(c-0.188,0) -0.345,-0.784 ; 0.183,-0.798 0.183,0.155 0.183,0.79 ; -0.188,-0.795 -0.188,-0.376 -0.188,0 -0.188,0.792 ; 0.183,0.795 cw(c0.183,-0.005) 0.983,-0.003 ; -0.188,0.8 ccw(c-0.188,0) -0.327,0.788 ; -0.345,-0.784 cw(c-0.188,0) -0.988,-0.003 ; -0.345,-0.784 cw(c-0.188,0) -0.988,-0.003 ; 0.982,-0.051 cw(c0.183,-0.005) 0.183,-0.805 ccw(c0.183,-0.005) 0.656,-0.65 ccw(c0.183,-0.005) 0.982,-0.051 ; 0.982,-0.051 ccw(c0.183,-0.005) 0.983,-0.003 ; 0.982,-0.051 ccw(c0.183,-0.005) 0.983,-0.003 ; -0.988,-0.003 cw(c-0.188,0) -0.815,0.496 cw(c-0.188,0) -0.327,0.788 ; -0.988,-0.003 cw(c-0.188,0) -0.327,0.788
  Top Layer lines w0.3: -0.298,-0.625 cw(c-0.188,0) -0.345,-0.615 ; -0.327,-0.376 cw(c-0.191,0) -0.345,-0.369 cw(c-0.191,0) -0.327,0.376 ; 0.34,-0.163 0.34,0.155 ; -0.345,-0.16 -0.345,0 -0.345,0.157 ; 0.293,0.62 cw(c0.183,-0.005) 0.818,-0.003 ; -0.298,0.625 ccw(c-0.188,0) -0.327,0.62 ; -0.345,-0.615 cw(c-0.188,0) -0.823,-0.003 ; -0.345,-0.615 cw(c-0.188,0) -0.823,-0.003 ; 0.816,-0.051 cw(c0.183,-0.005) 0.293,-0.63 ccw(c0.183,-0.005) 0.78,-0.22 ccw(c0.183,-0.005) 0.816,-0.051 ; 0.816,-0.051 ccw(c0.183,-0.005) 0.818,-0.003 ; 0.816,-0.051 ccw(c0.183,-0.005) 0.818,-0.003 ; 0.583,-0.051 cw(c0.185,-0.005) 0.322,-0.381 ccw(c0.185,-0.005) 0.559,-0.148 ccw(c0.185,-0.005) 0.583,-0.051 ; 0.583,-0.051 ccw(c0.185,-0.005) 0.322,0.371 cw(c0.185,-0.005) 0.583,-0.051 ; -0.823,-0.003 cw(c-0.188,0) -0.327,0.62 ; -0.823,-0.003 cw(c-0.188,0) -0.798,0.176 cw(c-0.188,0) -0.327,0.62
SOT23_HIS_PRIMARY [mm]
  rect 0.9x1 smd: 1(0,0) 2(2.032,0) 3(1.016,2.21)
  silkscreen extent -0.51,0.46 2.54,1.73
SOT-23-TT3_N [mm] "SOT23, 3-Leads, Body 2.9x1.3mm, Pitch 0.95mm, Lead Span 2.4mm, IPC Medium Density"
  rect 1.5x0.6 smd: 1(-0.95,0.95) 2(-0.95,-0.95) 3(0.95,0)
  silkscreen extent -1.07,-1.5 0.7,1.93, body extent -0.7,-1.5 0.7,1.5, height 1.12
SSOP28 [mm]
  oval 1.8x0.35 smd: 1(-2.29,0.039)
  rect 1.8x0.35 smd: 2(-2.29,-0.611) 3(-2.29,-1.261) 4(-2.29,-1.911) 5(-2.29,-2.561) 6(-2.29,-3.211) 7(-2.29,-3.861) 8(-2.29,-4.511) 9(-2.29,-5.161) 10(-2.29,-5.811) 11(-2.29,-6.461) 12(-2.29,-7.111) 13(-2.29,-7.761) 14(-2.29,-8.411) 15(4.76,-8.411) 16(4.76,-7.761) 17(4.76,-7.111) 18(4.76,-6.461) 19(4.76,-5.811) 20(4.76,-5.161) 21(4.76,-4.511) 22(4.76,-3.861) 23(4.76,-3.211) 24(4.76,-2.561) 25(4.76,-1.911) 26(4.76,-1.261) 27(4.76,-0.611) 28(4.76,0.039)
  silkscreen extent -0.94,-9.36 3.41,0.99
"STLZ950 2G-5.08-H" [mm]
  rect 2.8x2.8 hole 1.4: 1(0,0)
  round 2.8 hole 1.4: 2(5.08,0)
  silkscreen extent -3.56,-2.03 8.64,10.03
TO-247HV [mm]
  rect 2.3x2.3 hole 1.6: 1(0.011,0)
  round 2.3 hole 1.6: 2(5.461,-3) 3(10.911,0)
  round 0 hole 8 unplated: M3(5.456,18.9)
  silkscreen extent -2.57,5 13.46,25
TQFP-PT64_N [mm] "Thin QFP, 64-Leads, Body 10x10mm, Pitch 0.5mm, IPC Medium Density"
  oval 1.8x0.3 smd: 1(-5.55,3.75) 2(-5.55,3.25) 3(-5.55,2.75) 4(-5.55,2.25) 5(-5.55,1.75) 6(-5.55,1.25) 7(-5.55,0.75) 8(-5.55,0.25) 9(-5.55,-0.25) 10(-5.55,-0.75) 11(-5.55,-1.25) 12(-5.55,-1.75) 13(-5.55,-2.25) 14(-5.55,-2.75) 15(-5.55,-3.25) 16(-5.55,-3.75) 33(5.55,-3.75) 34(5.55,-3.25) 35(5.55,-2.75) 36(5.55,-2.25) 37(5.55,-1.75) 38(5.55,-1.25) 39(5.55,-0.75) 40(5.55,-0.25) 41(5.55,0.25) 42(5.55,0.75) 43(5.55,1.25) 44(5.55,1.75) 45(5.55,2.25) 46(5.55,2.75) 47(5.55,3.25) 48(5.55,3.75)
  oval 0.3x1.8 smd: 17(-3.75,-5.55) 18(-3.25,-5.55) 19(-2.75,-5.55) 20(-2.25,-5.55) 21(-1.75,-5.55) 22(-1.25,-5.55) 23(-0.75,-5.55) 24(-0.25,-5.55) 25(0.25,-5.55) 26(0.75,-5.55) 27(1.25,-5.55) 28(1.75,-5.55) 29(2.25,-5.55) 30(2.75,-5.55) 31(3.25,-5.55) 32(3.75,-5.55) 49(3.75,5.55) 50(3.25,5.55) 51(2.75,5.55) 52(2.25,5.55) 53(1.75,5.55) 54(1.25,5.55) 55(0.75,5.55) 56(0.25,5.55) 57(-0.25,5.55) 58(-0.75,5.55) 59(-1.25,5.55) 60(-1.75,5.55) 61(-2.25,5.55) 62(-2.75,5.55) 63(-3.25,5.55) 64(-3.75,5.55)
  silkscreen extent -5.67,-4.25 4.25,4.57
USB2.5-2H4D [mm] "Connector; USB1.1, Type B, Thru-Hole; 4 Position; Right Angle"
  rect 1.6x1.6 hole 0.92: 1(-1,1.25)
  round 1.6 hole 0.92: 2(-1,-1.25) 3(1,-1.25) 4(1,1.25)
  round 3.8 hole 2.3: 5(3.71,6.02) 6(3.71,-6.02)
  silkscreen extent -3.18,-6.02 13.99,6.02, body extent -2.41,-6.02 13.99,6.02, height 11.1
VARISTOR_14 [mm]
  round 2.2 hole 1.2: 1(-3.75,1.25) 2(3.75,-1.25)
  silkscreen extent -9,-2.7 9,2.7
WSHR_SPRWSHR_NUT_3MM [mm]
  round 0 / inner round 3 / far side round 0 hole 3.2 unplated: 1(0,0)
  silkscreen extent -3.4,-3.4 3.4,3.4
WSHR_SPRWSHR_NUT_4MM [mm]
  round 0 hole 4.2 unplated: 1(0,0)
  silkscreen extent -4.4,-4.4 4.4,4.4
XTAL [mm] "XTAL SMD"
  rect 5x2 smd: 1(-0.127,0) 2(9.673,0)
  silkscreen extent -3.13,-3 12.67,3

## Part data
C2 C32 C33 C42 C43 C49 C50 C53 C56 C57 C58 C63 C68 C69 C71 C72: library part "Cap pol"
C8: library part "CAP CASE D"
D2 D3 D4 D15 D16 D27 D29: "Silicon Schottky Diodes"
D5: "Zener Diode"
D6 D7: "1.0 Ampere General Purpose Rectifier"
D8: "SEMIKRON - P1000S - DIODE, RECTIFIER, 10A, 1200V, AXIAL"
D9 D10: "HiPerFREDTM Epitaxial Diode with soft recovery"
D11 D12 D13 D14 D18 D19 D21 D22 D25 D26: "DIODE, SINGLE SOT-23"
D23: library part FEP30DP, "Schottky Rectifier"
D30 D36: library part S1A
DC1: "DC/DC CONVERTER, 3W 5V"
J2: "USB 1.1, Right Angle, Thru-Hole, B Type, Receptacle, 4 Position, White"
L2 L3 L4 L5: library part "RM-xx Choke"
L6 L7 L9 R1 R2 R3 R4 R5 R6 R7 R8 R9 R10 R11 R12 R13 R14 R15 R16 R17 R18 R19 R20 R21 R22 R23 R24 R25 R26 R27 R28 R29 R30 R31 R32 R35 R36 R39 R40 R41 R42 R43 R44 R45 R46 R47 R48 R49 R50 R51 R52 R53 R54 R55 R56 R57 R58 R62 R63 R64 R65 R66 R67 R68 R69 R70 R71 R72 R73 R74 R75 R76 R77 R78 R79 R80 R81 R82 R83 R84 R85 R86 R87 R88 R89 R90 R91 R92 R93 R94 R95 R96 R97 R99 R101 R106 R112 R116 R120: library part "RES 1"
L8 L10: library part "BOURNS - SRP1270-xxxM", "BOURNS - SRP1270-100M - INDUCTOR, SMD, 10UH, 16A"
LED9 RX_LED1 TX_LED1: library part LED
NTC1 VR1: library part VAR
P2 P10: "Header, right angled, 12 A, 250 V, pitch 5.08 mm, No. of poles:4"
P6: "Header, right angled, 12 A, 250 V, pitch 5.08 mm, No. of poles:2"
R33 R34 R37 R38: library part RES1
R59 R60 R61 R124: library part "RES 1", "MULTICOMP - MCPWR12FTEA2005 - RESISTOR, 2512, 20M 1%, 1.5W"
RP1: library part "Res Trim"
T1 T2 T7 T8 T10 T11: library part SPW21N50C3, "INFINEON - SPW21N50C3 - MOSFET, N, 500V, TO-247"
T3 T4 T12: library part "PA1005.XXXNL Series"
T5 T6: "NPN General Purpose Amplifier"
U1: library part MCP6022-I/SN, "Rail-to-Rail Input/Output, 10 MHz Operational Amplifier, 8-Pin SOIC, Industrial Temperature"
U3: "4Kbit, 400kHz, 2.5V, I2C Serial EEPROM, 8-Pin SOIC 150mil, Industrial Temperature"
U4: library part 25LC640AT-I/SN, "IC, SRAM, SERIAL, 256K, 2.7V, SOIC8"
U5: "Low-Power Linear Active Thermistor IC, 3-Pin SOT-23, Extended Temperature, Tape and Reel"
U9 U12: "2.7V to 6.0V Single Supply CMOS Operational Amplifier, 8-Pin SOIC, Industrial Temperature, Tape and Reel"
U10: "4.5A Dual High-Speed Power MOSFET Drivers, Inverting, Extended Temperature, Tape and Reel"
U11: library part IL300
U13: library part LD1086-XX, "STMICROELECTRONICS - LD1086D2T33TR - IC, V REG, LDO 3.3V, SMD"
U14 U18: "Half-Bridge Driver"

## Free pads (board coordinates)
  round 7 hole 5.5: 0(184.15,90.17) 0(184.15,103.632) 0(184.15,131.318) 0(184.277,113.792)
  round 1.5 smd: 8(128.397,27.432) 8(128.397,30.099) 8(130.454,34.417) 8(131.216,37.135) 8(133.172,37.49) 8(145.263,29.794) 8(145.491,27.915) 8(146.329,31.318)
  round 1 smd: 8(141.757,22.123) 8(143.383,24.509)
  round 2 hole 1.127 unplated: .(88.9,4.445) .(88.9,6.985) .(88.9,9.525) .(88.9,12.065) .(88.9,14.605) .(88.9,17.145) .(88.9,19.685) .(88.9,22.225) .(88.9,24.765) .(88.9,27.305) .(88.9,29.845) .(88.9,32.385) .(88.9,34.925) .(88.9,37.465) .(91.44,4.445) .(91.44,6.985) .(91.44,9.525) .(91.44,12.065) .(91.44,14.605) .(91.44,17.145) .(91.44,19.685) .(91.44,22.225) .(91.44,24.765) .(91.44,27.305) .(91.44,29.845) .(91.44,32.385) .(91.44,34.925) .(91.44,37.465) .(91.44,40.005) .(91.44,42.545) .(91.44,45.085) .(91.44,47.625) .(91.44,50.165) .(93.98,4.445) .(93.98,6.985) .(93.98,9.525) .(93.98,12.065) .(93.98,14.605) .(93.98,17.145) .(93.98,19.685) .(93.98,22.225) .(93.98,24.765) .(93.98,27.305) .(93.98,29.845) .(93.98,32.385) .(93.98,34.925) .(93.98,37.465) .(93.98,40.005) .(93.98,42.545) .(93.98,45.085) .(93.98,47.625) .(93.98,50.165) .(96.52,4.445) .(96.52,6.985) .(96.52,9.525) .(96.52,12.065) .(96.52,14.605) .(96.52,17.145) .(96.52,19.685) .(96.52,22.225) .(96.52,24.765) .(96.52,27.305) .(96.52,29.845) .(96.52,32.385) .(96.52,34.925) .(96.52,37.465) .(96.52,40.005) .(96.52,42.545) .(96.52,45.085) .(96.52,47.625) .(96.52,50.165) .(99.06,4.445) .(99.06,6.985) .(99.06,9.525) .(99.06,12.065) .(99.06,14.605) .(99.06,17.145) .(99.06,19.685) .(99.06,22.225) .(99.06,24.765) .(99.06,27.305) .(99.06,29.845) .(99.06,32.385) .(99.06,34.925) .(99.06,37.465) .(99.06,40.005) .(99.06,42.545) .(99.06,45.085) .(99.06,47.625) .(99.06,50.165) .(101.6,4.445) .(101.6,6.985) .(101.6,9.525) .(101.6,12.065) .(101.6,14.605) .(101.6,17.145) .(101.6,19.685) .(101.6,22.225) .(101.6,24.765) .(101.6,27.305) .(101.6,29.845) .(101.6,32.385) .(101.6,34.925) .(101.6,37.465) .(101.6,40.005) .(101.6,42.545) .(101.6,45.085) .(101.6,47.625) .(101.6,50.165) .(104.14,4.445) .(104.14,6.985) .(104.14,9.525) .(104.14,12.065) .(104.14,14.605) .(104.14,17.145) .(104.14,19.685) .(104.14,22.225) .(104.14,24.765) .(104.14,27.305) .(104.14,29.845) .(104.14,32.385) .(104.14,34.925) .(104.14,37.465) .(104.14,40.005) .(104.14,42.545) .(104.14,45.085) .(104.14,47.625) .(104.14,50.165) .(106.68,4.445) .(106.68,6.985) .(106.68,9.525) .(106.68,12.065) .(106.68,14.605) .(106.68,17.145) .(106.68,19.685) .(106.68,22.225) .(106.68,24.765) .(106.68,27.305) .(106.68,29.845) .(106.68,32.385) .(106.68,34.925) .(106.68,37.465) .(106.68,40.005) .(106.68,42.545) .(106.68,45.085) .(106.68,47.625) .(106.68,50.165) .(109.22,4.445) .(109.22,6.985) .(109.22,9.525) .(109.22,12.065) .(109.22,14.605) .(109.22,17.145) .(109.22,19.685) .(109.22,22.225) .(109.22,24.765) .(109.22,27.305) .(109.22,29.845) .(109.22,32.385) .(109.22,34.925) .(109.22,37.465) .(109.22,40.005) .(109.22,42.545) .(109.22,45.085) .(109.22,47.625) .(109.22,50.165) .(111.76,4.445) .(111.76,6.985) .(111.76,9.525) .(111.76,12.065) .(111.76,14.605) .(111.76,17.145) .(111.76,19.685) .(111.76,22.225) .(111.76,24.765) .(111.76,27.305) .(111.76,29.845) .(111.76,32.385) .(111.76,34.925) .(111.76,37.465) .(111.76,40.005) .(111.76,42.545) .(111.76,45.085) .(111.76,47.625) .(111.76,50.165)

## Via types
v1: diameter 1.27, hole 0.711, Top Layer to Bottom Layer, 309 vias